# Altium PCB ARDUINO MEGA2560 EXPANSION BOARD_routeada sin pads.PcbDoc
Units mm, origin at the board's own origin, x right, y up, seen from the top; angles counter-clockwise.
Board outline 132.72 x 90.17 mm, 2 copper layers (Top Layer, Bottom Layer); 30 components, 58 nets, 210 pads, 0 vias.
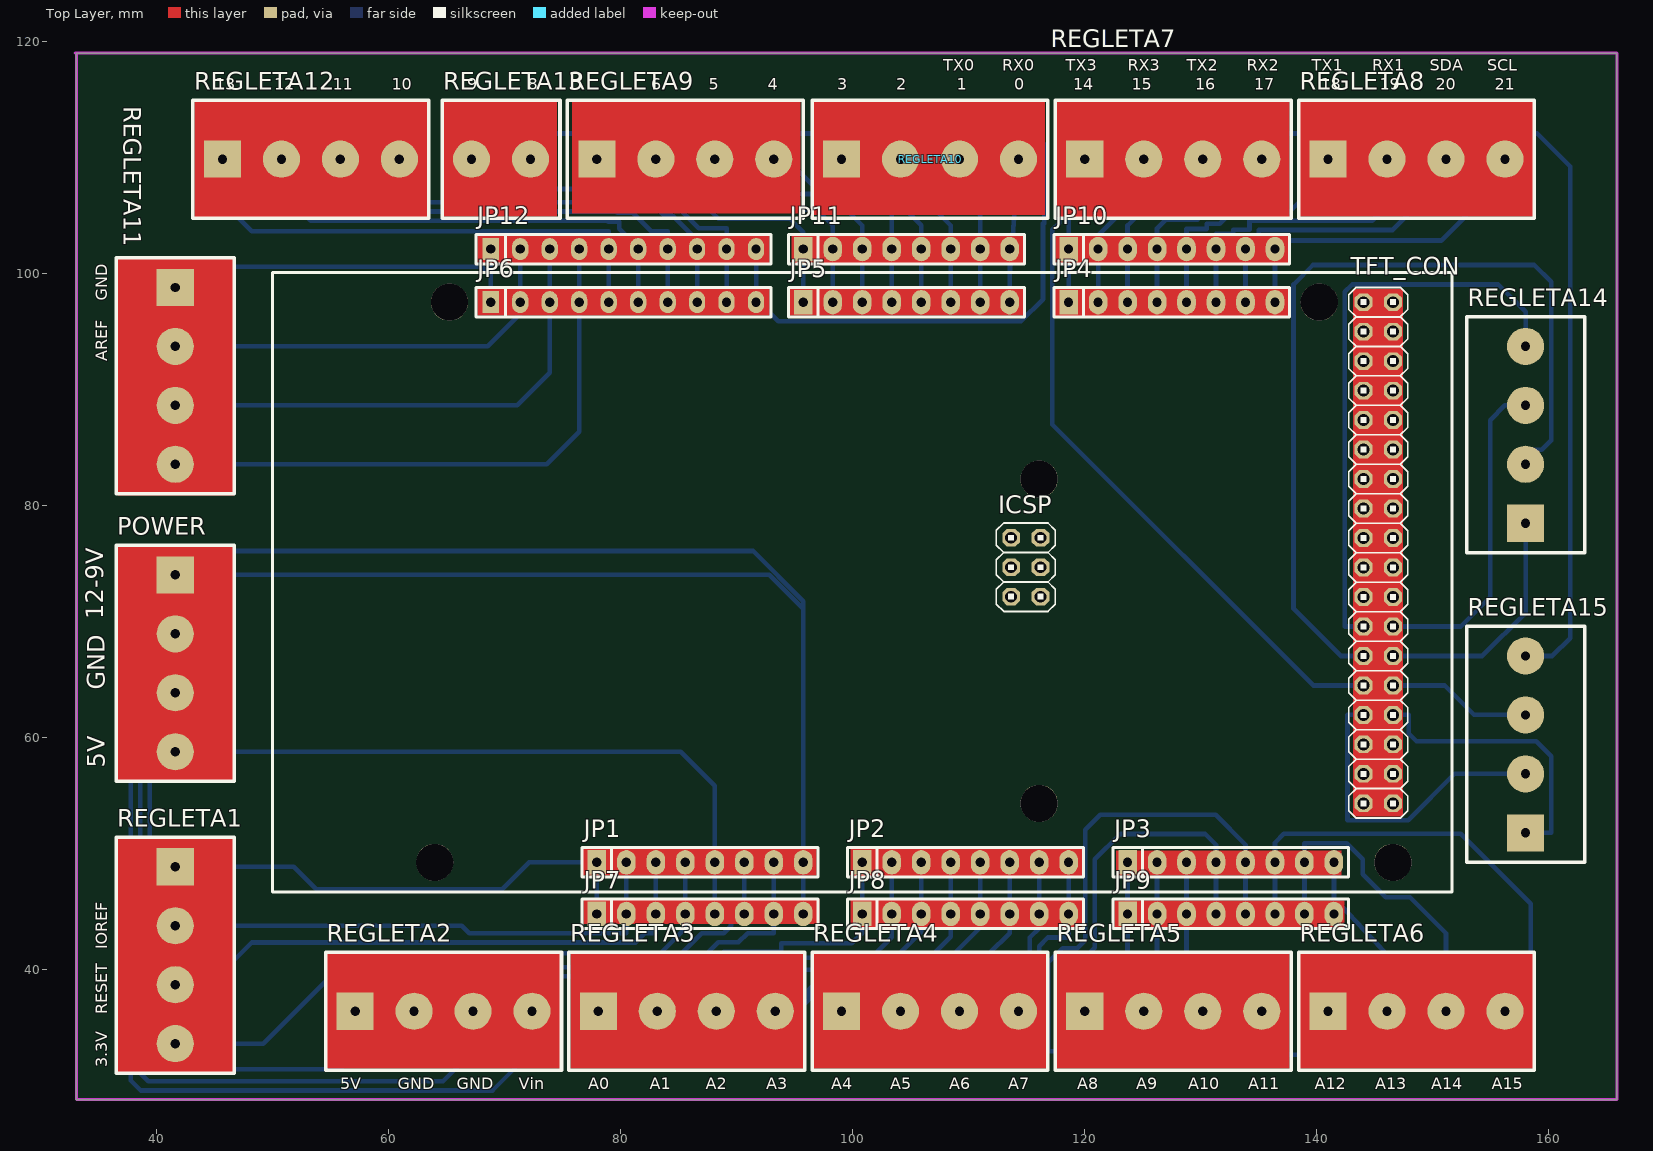
[diagram p0: Top Layer view]
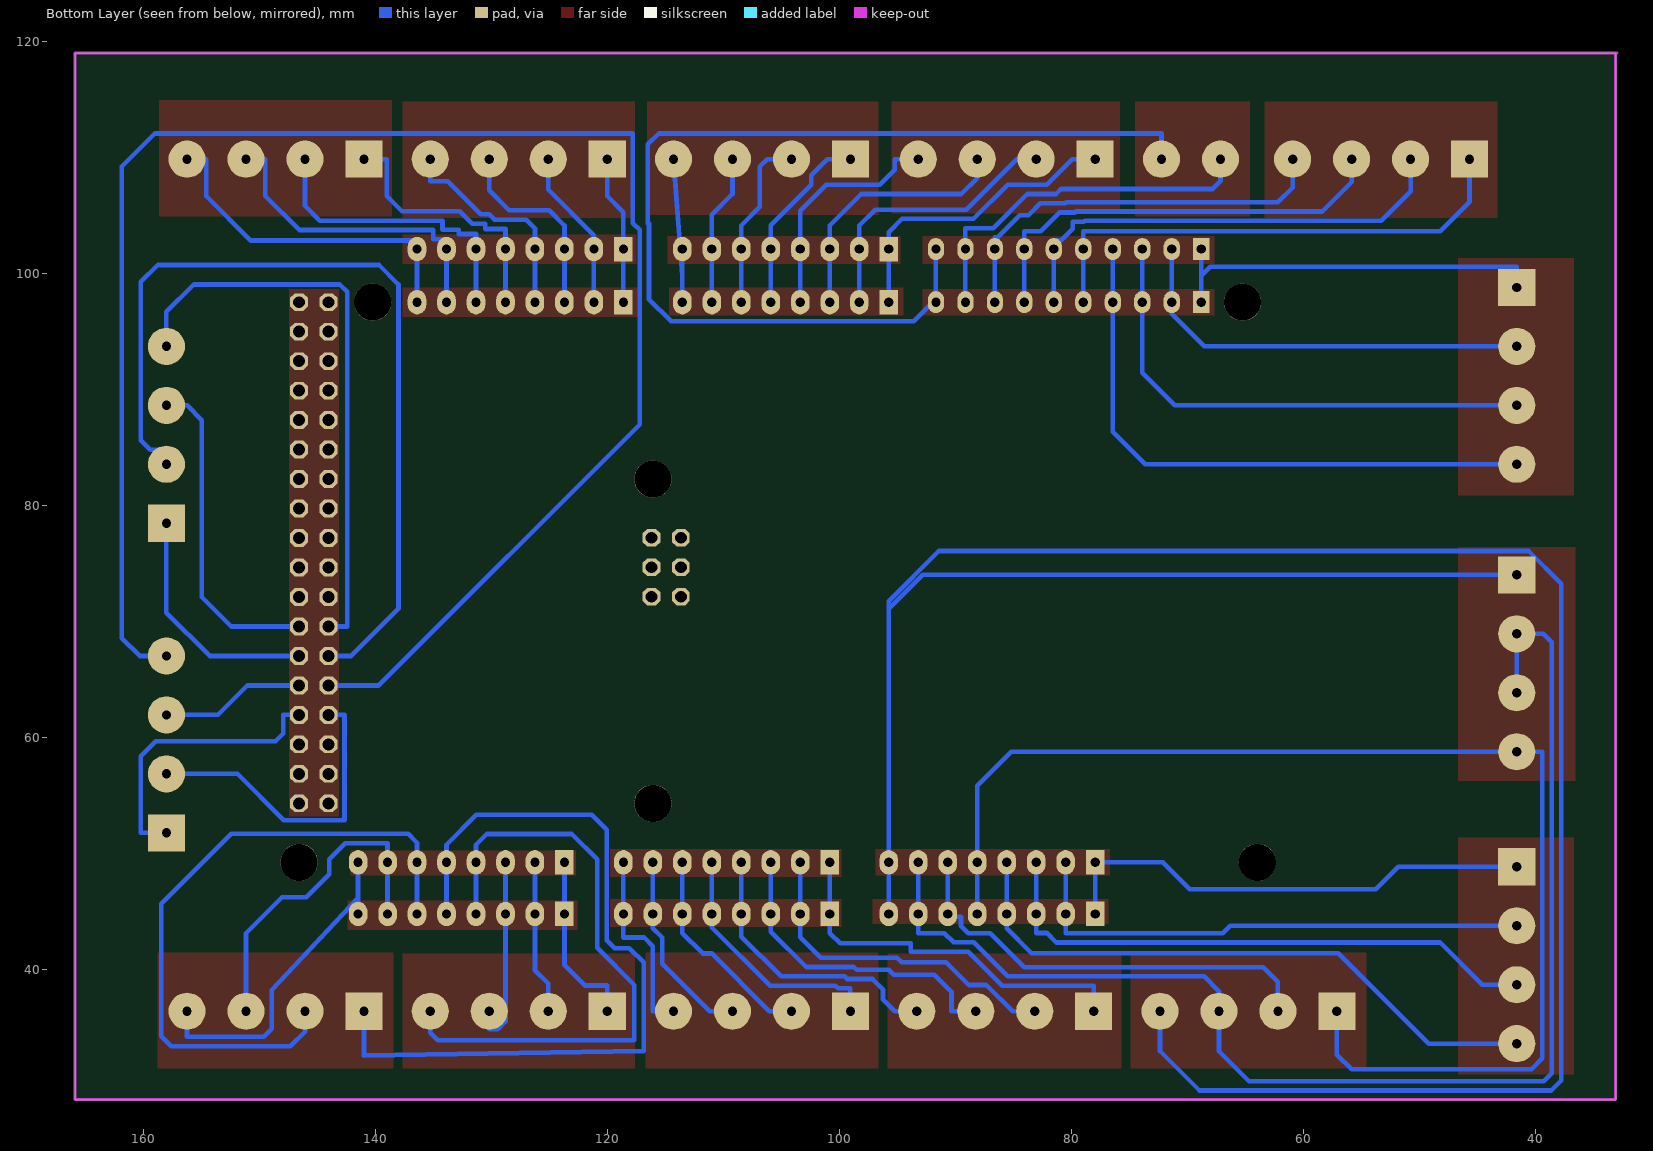
[diagram p1: Bottom Layer view, seen from below]

## Layer stack, top to bottom
Top Solder: solder mask 0.0102, Solder Resist, Dk 3.5
Top Layer: signal copper 0.0356
Dielectric 1: dielectric 0.32, FR-4, Dk 4.8
Bottom Layer: signal copper 0.0356
Bottom Solder: solder mask 0.0102, Solder Resist, Dk 3.5

## Board outline
33.147,118.999 33.147,28.829 162.306,28.829 165.862,28.829 165.862,118.999

## Design rules (kind name [scope] priority, off if disabled: settings)
Clearance [All] p1: gap=0.4
PolygonConnect [All] p1: connectstyle=Relief reliefconductorwidth=0.254 reliefentries=4 polygonreliefangle="90 Angle" airgapwidth=0.254
RoutingLayers [All] p1: top layer_v5=FALSE bottom layer_v5=TRUE
RoutingTopology [All] p1: topology=Daisy_Balanced
RoutingVias [All] p1: holewidth=0.711 width=1.5 viastyle="Through Hole" minholewidth=0.711 minwidth=1.5 maxholewidth=0.711 maxwidth=1.5
SolderMaskExpansion [All] p1: expansion=0.102
Width [All] p1: maxlimit=0.8 minlimit=0.4 preferedwidth=0.4
28 further rules are at their usual default settings.

## Components (designator, comment, footprint, x,y, rotation, side; value= is the part's Value field where it differs from the comment)
ICSP "SIP_2X3" SIP_2X03 113.665,77.216 r270 top
JP1 "SIP_8" SIP_8 77.978,49.276 r0 top
JP2 "SIP_8" SIP_8 100.838,49.276 r0 top
JP3 "SIP_8" SIP_8 123.698,49.276 r0 top
JP4 "SIP_8" SIP_8 118.618,97.536 r0 top
JP5 "SIP_8" SIP_8 95.758,97.536 r0 top
JP6 "SIP_10" SIP_10 68.834,97.536 r0 top
JP7 "SIP_8" SIP_8 77.978,44.831 r0 top
JP8 "SIP_8" SIP_8 100.838,44.831 r0 top
JP9 "SIP_8" SIP_8 123.698,44.831 r0 top
JP10 "SIP_8" SIP_8 118.618,102.108 r0 top
JP11 "SIP_8" SIP_8 95.758,102.108 r0 top
JP12 "SIP_10" SIP_10 68.834,102.108 r0 top
POWER "REGLETA_4" REGLETA_4 41.656,74.041 r270 top
REGLETA1 "REGLETA_4" REGLETA_4 41.656,48.895 r270 top
REGLETA2 "REGLETA_4" REGLETA_4 57.15,36.449 r0 top
REGLETA3 "REGLETA_4" REGLETA_4 78.105,36.449 r0 top
REGLETA4 "REGLETA_4" REGLETA_4 99.06,36.449 r0 top
REGLETA5 "REGLETA_4" REGLETA_4 120.015,36.449 r0 top
REGLETA6 "REGLETA_4" REGLETA_4 140.97,36.449 r0 top
REGLETA7 "REGLETA_4" REGLETA_4 120.015,109.855 r0 top
REGLETA8 "REGLETA_4" REGLETA_4 140.97,109.855 r0 top
REGLETA9 "REGLETA_4" REGLETA_4 77.978,109.855 r0 top
REGLETA10 "REGLETA_4" REGLETA_4 99.06,109.855 r0 top
REGLETA11 "REGLETA_4" REGLETA_4 41.656,98.806 r270 top
REGLETA12 "REGLETA_4" REGLETA_4 45.72,109.855 r0 top
REGLETA13 "REGLETA_2" REGLETA_2 67.183,109.855 r0 top
REGLETA14 "REGLETA_4" REGLETA_4 157.988,78.486 r90 top
REGLETA15 "REGLETA_4" REGLETA_4 157.988,51.816 r90 top
TFT_CON "SIP_2X18" SIP_2X18 144.018,97.536 r270 top

## Footprints (in the part's own frame and the unit in brackets; to place one, negate y for a bottom-side part, rotate by r counter-clockwise, add the part's x,y. Pads: shape width x height; smd on the part's side, far side on the other; paste and mask are expansions set on the pad)
REGLETA_2 [mm]
  round 3.2 hole 0.8: 1(0,0) 2(5.08,0)
  silkscreen extent -2.54,-5.08 7.62,5.08
REGLETA_4 [mm]
  rect 3.2x3.2 hole 0.8: 1(0,0)
  round 3.2 hole 0.8: 2(5.08,0) 3(10.16,0) 4(15.24,0)
  silkscreen extent -2.54,-5.08 17.78,5.08
SIP_2X03 [mil]
  oct 60x60 hole 40: 1(-0.98,0) 2(-0.98,100) 3(99.02,0) 4(99.02,100) 5(199.02,0) 6(199.02,100)
  silkscreen extent -51,-50 249,150
SIP_2X18 [mil]
  oct 60x60 hole 40: 1(0,0) 2(0,100) 3(100,0) 4(100,100) 5(200,0) 6(200,100) 7(300,0) 8(300,100) 9(400,0) 10(400,100) 11(500,0) 12(500,100) 13(600,0) 14(600,100) 15(700,0) 16(700,100) 17(800,0) 18(800,100) 19(900,0) 20(900,100) 21(1000,0) 22(1000,100) 23(1100,0) 24(1100,100) 25(1200,0) 26(1200,100) 27(1300,0) 28(1300,100) 29(1400,0) 30(1400,100) 31(1500,0) 32(1500,100) 33(1600,0) 34(1600,100) 35(1700,0) 36(1700,100)
  silkscreen extent -50,-50 1750,150
SIP_8 [mm]
  rect 1.6x2.1 hole 0.8: 1(0,0)
  oval 1.6x2.1 hole 0.8: 2(2.54,0) 3(5.08,0) 4(7.62,0) 5(10.16,0) 6(12.7,0) 7(15.24,0) 8(17.78,0)
  silkscreen extent -1.27,-1.27 19.05,1.27
SIP_10 [mm]
  rect 1.4x1.9 hole 0.8: 1(0,0)
  oval 1.4x1.9 hole 0.8: 2(2.54,0) 3(5.08,0) 4(7.62,0) 5(10.16,0) 6(12.7,0) 7(15.24,0) 8(17.78,0) 9(20.32,0) 10(22.86,0)
  silkscreen extent -1.27,-1.27 24.13,1.27

## Free pads (board coordinates)
  round 3.2 hole 3.2: 1(64.008,49.276) 1(65.278,97.536) 1(116.078,54.356) 1(116.078,82.296) 1(140.208,97.536) 1(146.558,49.276)

## Nets (pads, with @x,y where several pads share a name; then routed paths per layer and width w, separated by ;. In a path a pad name is that pad's centre, name@x,y a point inside that pad or via, vN(x,y) a via of type N, cw(c..) or ccw(c..) an arc to the next point about the centre after c; other vN are vias at no path point)
NetJP1_1: JP1.1 JP7.1 REGLETA1.1 | length 42.5
  Bottom Layer w0.4: REGLETA1.1 51.867,48.895 53.797,46.965 69.825,46.965 72.136,49.276 JP1.1 JP7.1
NetJP1_2: JP1.2 JP7.2 REGLETA1.2 | length 45.2
  Bottom Layer w0.4: REGLETA1.2 66.332,43.815 66.98,43.167 80.518,43.167 JP7.2 JP1.2
NetJP1_3: JP1.3 JP7.3 REGLETA1.3 | length 49.3
  Bottom Layer w0.4: REGLETA1.3 44.628,38.735 48.26,42.367 81.331,42.367 82.156,43.192 83.058,43.192 JP7.3 JP1.3
NetJP1_4: JP1.4 JP7.4 REGLETA1.4 | length 53.7
  Bottom Layer w0.4: REGLETA1.4 49.225,33.655 57.019,41.449 83.461,41.449 85.598,43.586 JP7.4 JP1.4
NetJP1_5: JP1.5 JP7.5 POWER.4 REGLETA2.1 | length 109.7
  Bottom Layer w0.4: REGLETA2.1 57.15,32.715 55.88,31.445 40.386,31.445 39.446,32.385 39.446,58.801 POWER.4 85.217,58.801 88.138,55.88 JP1.5 JP7.5
NetJP1_6: JP1.6 JP7.6 REGLETA2.2 | length 38.4
  Bottom Layer w0.4: REGLETA2.2 62.23,38.979 63.5,40.249 84.089,40.249 87.021,43.181 88.9,43.181 89.538,43.819 89.538,44.577 90.678,44.577 JP7.6 JP1.6
NetJP1_7: JP1.7 JP7.7 POWER.2 POWER.3 REGLETA2.3 | length 114.8
  Bottom Layer w0.4: POWER.3 POWER.2 39.37,68.961 38.633,68.224 38.633,31.115 39.319,30.429 64.719,30.429 67.31,33.02 REGLETA2.3 67.31,38.179 68.58,39.449 85.504,39.449 88.436,42.381 90.174,42.381 90.973,43.18 93.218,43.18 JP7.7 JP1.7
NetJP1_8: JP1.8 JP7.8 POWER.1 REGLETA2.4 | length 225.7
  Bottom Layer w0.4: POWER.1 92.837,74.041 95.758,71.12 ; REGLETA2.4 72.39,33.02 68.986,29.616 38.684,29.616 37.821,30.48 37.821,73.279 40.64,76.098 91.44,76.098 95.758,71.78 95.758,71.12 ; JP7.8 95.758,47.041 JP1.8 95.758,71.12
NetJP2_1: JP2.1 JP8.1 REGLETA3.1 | length 33.3
  Bottom Layer w0.4: REGLETA3.1 78.105,38.649 85.969,38.649 88.9,41.58 93.853,41.58 93.853,42.291 99.949,42.291 100.838,43.18 JP8.1 JP2.1
NetJP2_2: JP2.2 JP8.2 REGLETA3.2 | length 29.3
  Bottom Layer w0.4: REGLETA3.2 85.09,36.449 87.346,38.705 88.871,38.705 90.826,40.659 94.648,40.659 95.048,41.059 101.6,41.059 103.378,42.837 JP8.2 JP2.2
NetJP2_3: JP2.3 JP8.3 REGLETA3.3 | length 27.4
  Bottom Layer w0.4: REGLETA3.3 90.348,36.449 90.348,38.1 91.829,39.581 95.325,39.581 95.763,40.019 98.525,40.019 98.766,40.259 102.87,40.259 105.918,43.307 JP8.3 JP2.3
NetJP2_4: JP2.4 JP8.4 REGLETA3.4 | length 24.7
  Bottom Layer w0.4: REGLETA3.4 95.25,36.449 96.248,37.447 96.248,38.312 97.155,39.219 99.325,39.219 99.556,39.449 105.029,39.449 108.458,42.878 JP8.4 JP2.4
NetJP2_5: JP2.5 JP8.5 REGLETA4.1 | length 21.7
  Bottom Layer w0.4: REGLETA4.1 99.06,38.419 100.125,38.419 100.356,38.649 105.983,38.649 110.998,43.664 JP8.5 JP2.5
NetJP2_6: JP2.6 JP8.6 REGLETA4.2 | length 18.3
  Bottom Layer w0.4: REGLETA4.2 106.045,36.449 111.023,41.427 111.785,41.427 113.538,43.18 JP8.6 JP2.6
NetJP2_7: JP2.7 JP8.7 REGLETA4.3 | length 16.8
  Bottom Layer w0.4: REGLETA4.3 111.189,36.449 115.278,40.538 115.278,42.799 116.078,43.599 JP8.7 JP2.7
NetJP2_8: JP2.8 JP8.8 REGLETA4.4 | length 16.7
  Bottom Layer w0.4: REGLETA4.4 116.078,36.449 116.078,42.037 116.84,42.799 118.618,42.799 JP8.8 JP2.8
NetJP3_1: JP3.1 JP9.1 REGLETA5.1 | length 15.5
  Bottom Layer w0.4: REGLETA5.1 120.015,38.659 121.92,38.659 123.698,40.437 JP9.1 JP3.1
NetJP3_2: JP3.2 JP9.2 REGLETA5.2 | length 13.3
  Bottom Layer w0.4: REGLETA5.2 125.095,38.837 126.238,39.98 JP9.2 JP3.2
NetJP3_3: JP3.3 JP9.3 REGLETA5.3 | length 16.9
  Bottom Layer w0.4: JP3.3 128.778,47.041 JP9.3 128.778,35.56 129.439,34.899 130.175,34.899 REGLETA5.3
NetJP3_4: JP3.4 JP9.4 REGLETA5.4 | length 54.3
  Bottom Layer w0.4: JP9.4 JP3.4 131.318,50.8 130.404,51.714 123.063,51.714 120.879,49.53 120.879,41.91 117.678,38.709 117.678,33.96 134.62,33.96 135.255,34.595 REGLETA5.4
NetJP3_5: JP3.5 JP9.5 REGLETA6.1 | length 70.4
  Bottom Layer w0.4: JP9.5 JP3.5 133.858,50.8 131.293,53.365 121.336,53.365 120.04,52.07 120.04,42.545 119.38,41.885 118.11,41.885 116.878,40.653 116.878,33.02 140.97,32.639 REGLETA6.1
NetJP3_6: JP3.6 JP9.6 REGLETA6.2 | length 57.4
  Bottom Layer w0.4: JP9.6 JP3.6 136.398,50.978 137.16,51.74 152.4,51.74 158.42,45.72 158.42,34.29 157.556,33.426 147.32,33.426 146.05,34.696 REGLETA6.2
NetJP3_7: JP3.7 JP9.7 REGLETA6.3 | length 29
  Bottom Layer w0.4: JP9.7 JP3.7 138.938,50.927 142.57,50.927 143.967,49.53 143.967,48.26 145.948,46.279 148.031,46.279 151.13,43.18 REGLETA6.3
NetJP3_8: JP3.8 JP9.8 REGLETA6.4 | length 28.4
  Bottom Layer w0.4: JP9.8 141.478,46.215 ; JP3.8 141.478,46.215 ; REGLETA6.4 156.21,34.249 149.596,34.249 148.92,34.925 148.92,38.278 142.169,45.479 141.478,46.215
NetJP4_1: JP4.1 JP10.1 REGLETA7.1 | length 12.9
  Bottom Layer w0.4: JP4.1 JP10.1 118.618,105.283 120.015,106.68 REGLETA7.1
NetJP4_2: JP4.2 JP10.2 REGLETA7.2 | length 13.9
  Bottom Layer w0.4: JP4.2 JP10.2 121.158,103.302 125.095,107.239 REGLETA7.2
NetJP4_3: JP4.3 JP10.3 REGLETA7.3 | length 17
  Bottom Layer w0.4: JP4.3 JP10.3 123.698,104.14 125.019,105.461 128.474,105.461 130.175,107.162 REGLETA7.3
NetJP4_4: JP4.4 JP10.4 REGLETA7.4 | length 19
  Bottom Layer w0.4: JP4.4 JP10.4 126.238,103.886 127,104.648 129.718,104.648 130.175,105.105 130.911,105.105 133.757,107.95 135.255,107.95 REGLETA7.4
NetJP4_5: JP4.5 JP10.5 REGLETA8.1 | length 23.1
  Bottom Layer w0.4: JP4.5 JP10.5 128.778,103.835 130.531,103.835 130.531,104.292 131.649,104.292 132.715,105.358 137.692,105.358 139.014,106.68 139.014,109.855 REGLETA8.1
NetJP4_6: JP4.6 JP10.6 REGLETA8.2 | length 26.3
  Bottom Layer w0.4: JP4.6 JP10.6 131.318,103.404 132.816,103.404 132.816,103.759 134.198,103.759 134.198,104.558 144.78,104.558 146.05,105.828 REGLETA8.2
NetJP4_7: JP4.7 JP10.7 REGLETA8.3 | length 27.9
  Bottom Layer w0.4: JP4.7 JP10.7 133.858,102.946 135.001,102.946 135.001,103.758 146.557,103.758 149.479,106.68 149.479,109.855 REGLETA8.3
NetJP4_8: JP4.8 JP10.8 REGLETA8.4 | length 29.9
  Bottom Layer w0.4: JP4.8 JP10.8 136.398,102.845 150.724,102.845 154.559,106.68 154.559,109.855 REGLETA8.4
NetJP5_1: JP5.1 JP11.1 REGLETA9.1 | length 26.4
  Bottom Layer w0.4: REGLETA9.1 79.947,109.855 82.147,107.655 85.512,107.655 88.456,104.711 94.615,104.711 95.758,103.568 JP11.1 JP5.1
NetJP5_2: JP5.2 JP11.2 REGLETA9.2 | length 24.2
  Bottom Layer w0.4: REGLETA9.2 84.727,109.855 89.071,105.511 96.927,105.511 98.298,104.14 JP11.2 JP5.2
NetJP5_3: JP5.3 JP11.3 REGLETA9.3 | length 22.6
  Bottom Layer w0.4: REGLETA9.3 88.138,108.229 89.512,106.855 98.123,106.855 100.838,104.14 JP11.3 JP5.3
NetJP5_4: JP5.4 JP11.4 REGLETA9.4 | length 20.4
  Bottom Layer w0.4: REGLETA9.4 95.25,109.855 95.25,108.925 96.52,107.655 101.133,107.655 103.378,105.41 JP11.4 JP5.4
NetJP5_5: JP5.5 JP11.5 REGLETA10.1 | length 16.3
  Bottom Layer w0.4: REGLETA10.1 101.038,109.855 102.438,108.455 102.438,107.645 105.918,104.165 JP11.5 JP5.5
NetJP5_6: JP5.6 JP11.6 REGLETA10.2 | length 15.3
  Bottom Layer w0.4: REGLETA10.2 106.223,109.855 106.858,109.22 106.858,105.74 108.458,104.14 JP11.6 JP5.6
NetJP5_7: JP5.7 JP11.7 REGLETA10.3 | length 13.1
  Bottom Layer w0.4: REGLETA10.3 109.22,106.858 110.998,105.08 JP11.7 JP5.7
NetJP5_8: JP5.8 JP11.8 REGLETA10.4 | length 14.6
  Bottom Layer w0.4: JP5.8 113.538,99.822 ; JP11.8 113.538,100.025 113.538,99.822 ; REGLETA10.4 113.711,102.095 113.538,99.822
NetJP6_1: JP6.1 JP12.1 REGLETA11.1 | length 33.8
  Bottom Layer w0.4: REGLETA11.1 41.656,100.584 68.072,100.584 68.834,99.822 ; JP6.1 68.834,99.822 ; JP12.1 68.834,99.822
NetJP6_2: JP6.2 JP12.2 REGLETA11.2 | length 36.5
  Bottom Layer w0.4: REGLETA11.2 68.58,93.726 71.374,96.52 JP6.2 JP12.2
NetJP6_3: JP6.3 JP12.3 REGLETA11.3 | length 44.1
  Bottom Layer w0.4: REGLETA11.3 71.12,88.646 73.914,91.44 JP6.3 JP12.3
NetJP6_4: JP6.4 JP12.4 REGLETA11.4 | length 51.7
  Bottom Layer w0.4: REGLETA11.4 73.66,83.566 76.454,86.36 JP6.4 JP12.4
NetJP6_5: JP6.5 JP12.5 REGLETA12.1 | length 44.1
  Bottom Layer w0.4: REGLETA12.1 45.72,106.198 48.26,103.658 78.144,103.658 78.147,103.655 78.994,103.655 JP12.5 JP6.5
NetJP6_6: JP6.6 JP12.6 REGLETA12.2 | length 40.9
  Bottom Layer w0.4: REGLETA12.2 50.8,107.086 53.34,104.546 78.855,104.546 78.947,104.455 79.892,104.455 79.892,103.865 80.898,102.858 81.534,102.858 JP12.6 JP6.6
NetJP6_7: JP6.7 JP12.7 REGLETA12.3 | length 38
  Bottom Layer w0.4: REGLETA12.3 55.88,107.886 58.42,105.346 79.655,105.346 79.747,105.255 81.077,105.255 82.674,103.658 84.074,103.658 JP12.7 JP6.7
NetJP6_8: JP6.8 JP12.8 REGLETA12.4 | length 35.5
  Bottom Layer w0.4: REGLETA12.4 60.96,107.416 62.23,106.146 80.455,106.146 80.547,106.055 82.693,106.055 83.719,105.029 84.455,105.029 86.369,103.115 86.614,103.115 JP12.8 JP6.8
NetJP6_9: JP6.9 JP12.9 REGLETA13.1 | length 31.9
  Bottom Layer w0.4: REGLETA13.1 67.183,107.95 67.843,107.29 80.912,107.29 81.347,106.855 83.81,106.855 86.753,103.911 89.154,103.911 JP12.9 JP6.9
NetJP6_10: JP6.10 JP12.10 REGLETA13.2 | length 91.1
  Bottom Layer w0.4: REGLETA13.2 72.263,112.065 115.57,112.065 116.51,111.125 116.51,104.308 116.418,104.308 116.418,97.79 114.513,95.885 93.599,95.885 JP6.10@91.694,97.79 ; JP6.10 JP6.10@91.694,97.79 ; JP12.10 91.694,99.822 JP6.10@91.694,97.79
NetREGLETA14_1: REGLETA14.1 TFT_CON.26 | length 20.7
  Bottom Layer w0.4: TFT_CON.26 154.254,67.056 157.988,70.79 REGLETA14.1
NetREGLETA14_2: REGLETA14.2 TFT_CON.25 | length 76.6
  Bottom Layer w0.4: TFT_CON.25 142.062,67.056 137.998,71.12 137.998,99.06 139.675,100.736 158.75,100.736 160.198,99.289 160.198,85.623 159.385,84.811 157.988,84.811 REGLETA14.2
NetREGLETA14_3: REGLETA14.3 TFT_CON.24 | length 28.2
  Bottom Layer w0.4: TFT_CON.24 152.4,69.596 154.94,72.136 154.94,87.376 156.21,88.646 REGLETA14.3
NetREGLETA14_4: REGLETA14.4 TFT_CON.23 | length 50.2
  Bottom Layer w0.4: TFT_CON.23 142.408,69.596 142.408,98.425 143.043,99.06 155.626,99.06 157.988,96.698 REGLETA14.4
NetREGLETA15_1: REGLETA15.1 TFT_CON.30 | length 24.9
  Bottom Layer w0.4: TFT_CON.30 147.93,61.976 147.93,60.376 148.59,59.715 158.902,59.715 160.198,58.42 160.198,51.816 REGLETA15.1
NetREGLETA15_2: REGLETA15.2 TFT_CON.29 | length 27.4
  Bottom Layer w0.4: TFT_CON.29 142.646,61.976 142.646,52.902 147.869,52.902 151.863,56.896 REGLETA15.2
NetREGLETA15_3: REGLETA15.3 TFT_CON.28 | length 12.5
  Bottom Layer w0.4: TFT_CON.28 151.003,64.516 153.543,61.976 REGLETA15.3
NetREGLETA15_4: REGLETA15.4 TFT_CON.27 | length 151.7
  Bottom Layer w0.4: TFT_CON.27 139.7,64.516 117.218,86.998 117.218,103.759 117.805,104.346 117.805,112.065 158.979,112.065 161.823,109.22 161.823,68.58 160.299,67.056 REGLETA15.4
pads on no net: ICSP.1 ICSP.2 ICSP.3 ICSP.4 ICSP.5 ICSP.6 TFT_CON.1 TFT_CON.2 TFT_CON.3 TFT_CON.4 TFT_CON.5 TFT_CON.6 TFT_CON.7 TFT_CON.8 TFT_CON.9 TFT_CON.10 TFT_CON.11 TFT_CON.12 TFT_CON.13 TFT_CON.14 TFT_CON.15 TFT_CON.16 TFT_CON.17 TFT_CON.18 TFT_CON.19 TFT_CON.20 TFT_CON.21 TFT_CON.22 TFT_CON.31 TFT_CON.32 TFT_CON.33 TFT_CON.34 TFT_CON.35 TFT_CON.36

## Keep-outs
Keep-Out Layer:
  lines w0.254: 33.02,118.999 165.862,118.999 165.862,28.829 33.147,28.829 33.147,118.999

## Other copper
Top Layer:
  rectangle: 36.576,56.261 46.736,76.454
  rectangle: 36.703,80.899 46.736,101.346
  rectangle: 43.307,104.775 63.373,114.808
  rectangle: 64.643,104.902 74.549,114.808
  rectangle: 75.819,105.156 95.504,114.808
  rectangle: 96.647,105.029 116.586,114.808
  rectangle: 117.602,104.775 137.668,114.808
  rectangle: 138.557,104.902 158.623,114.935
  rectangle: 36.703,30.988 46.736,51.435
  rectangle: 54.61,31.496 74.93,41.529
  rectangle: 75.692,31.496 95.885,41.402
  rectangle: 96.647,31.496 116.713,41.529
  rectangle: 117.602,31.496 137.668,41.402
  rectangle: 138.43,31.496 158.75,41.529
  rectangle: 67.691,100.838 92.837,103.251
  rectangle: 76.835,43.942 97.155,46.101
  rectangle: 76.708,48.133 96.901,50.419
  rectangle: 99.822,43.688 119.761,46.101
  rectangle: 99.822,48.006 119.761,50.419
  rectangle: 122.555,43.434 142.367,45.974
  rectangle: 122.682,48.133 142.113,50.292
  rectangle: 143.129,53.213 147.447,98.679
  rectangle: 117.348,96.266 137.668,98.806
  rectangle: 117.475,100.838 137.668,103.378
  rectangle: 67.691,96.393 92.837,98.679
  rectangle: 94.488,96.393 114.681,98.806
  rectangle: 94.742,100.838 114.808,103.251

## Silkscreen, mask and mechanical layers (free items; w line width, h text height)
Top Overlay:
  lines w0.254: 50.038,46.736 151.638,46.736 151.638,100.076 50.038,100.076 50.038,46.736
  text "TX0" at 107.823,117.475 h1.02
  text "RX0" at 112.903,117.475 h1.02
  text "TX3" at 118.364,117.475 h1.02
  text "RX3" at 123.698,117.475 h1.02
  text "TX2" at 128.778,117.475 h1.02
  text "RX2" at 133.985,117.475 h1.02
  text "TX1" at 139.573,117.475 h1.02
  text "RX1" at 144.78,117.475 h1.02
  text "SDA" at 149.733,117.475 h1.02
  text "SCL" at 154.686,117.475 h1.02
  text "13" at 45.085,115.824 h1.02
  text "12" at 50.165,115.824 h1.02
  text "11" at 55.245,115.824 h1.02
  text "10" at 60.325,115.824 h1.02
  text "9" at 66.802,115.824 h1.02
  text "8" at 72.009,115.824 h1.02
  text "6" at 82.677,115.824 h1.02
  text "5" at 87.63,115.824 h1.02
  text "4" at 92.71,115.824 h1.02
  text "3" at 98.679,115.824 h1.02
  text "2" at 103.759,115.824 h1.02
  text "1" at 108.966,115.824 h1.02
  text "0" at 113.919,115.824 h1.02
  text "14" at 118.999,115.824 h1.02
  text "15" at 124.079,115.824 h1.02
  text "16" at 129.54,115.824 h1.02
  text "17" at 134.62,115.824 h1.02
  text "18" at 140.335,115.824 h1.02
  text "19" at 145.415,115.824 h1.02
  text "20" at 150.241,115.824 h1.02
  text "21" at 155.321,115.824 h1.02
  text "GND" at 35.814,97.663 h1.02 r90
  text "AREF" at 35.814,92.456 h1.02 r90
  text "12-9V" at 35.433,70.231 h1.52 r90
  text "GND" at 35.56,64.135 h1.52 r90
  text "5V" at 35.56,57.404 h1.52 r90
  text "IOREF" at 35.814,41.783 h1.02 r90
  text "RESET" at 35.814,36.195 h1.02 r90
  text "3.3V" at 35.814,31.623 h1.02 r90
  text "5V" at 55.88,29.718 h1.02
  text "GND" at 60.833,29.718 h1.02
  text "GND" at 65.913,29.718 h1.02
  text "Vin" at 71.247,29.718 h1.02
  text "A0" at 77.216,29.718 h1.02
  text "A1" at 82.55,29.718 h1.02
  text "A2" at 87.376,29.718 h1.02
  text "A3" at 92.583,29.718 h1.02
  text "A4" at 98.171,29.718 h1.02
  text "A5" at 103.251,29.718 h1.02
  text "A6" at 108.331,29.718 h1.02
  text "A7" at 113.411,29.718 h1.02
  text "A8" at 119.38,29.718 h1.02
  text "A9" at 124.46,29.718 h1.02
  text "A10" at 128.905,29.718 h1.02
  text "A11" at 134.112,29.718 h1.02
  text "A12" at 139.827,29.718 h1.02
  text "A13" at 145.034,29.718 h1.02
  text "A14" at 149.86,29.718 h1.02
  text "A15" at 155.067,29.718 h1.02